# Altium PCB PCB1.PcbDoc
Units mil, origin at the board's own origin, x right, y up, seen from the top; angles counter-clockwise.
Board outline 4580 x 3075 mil, 2 copper layers (Top Layer, Bottom Layer); 11 components, 8 nets, 28 pads, 0 vias.
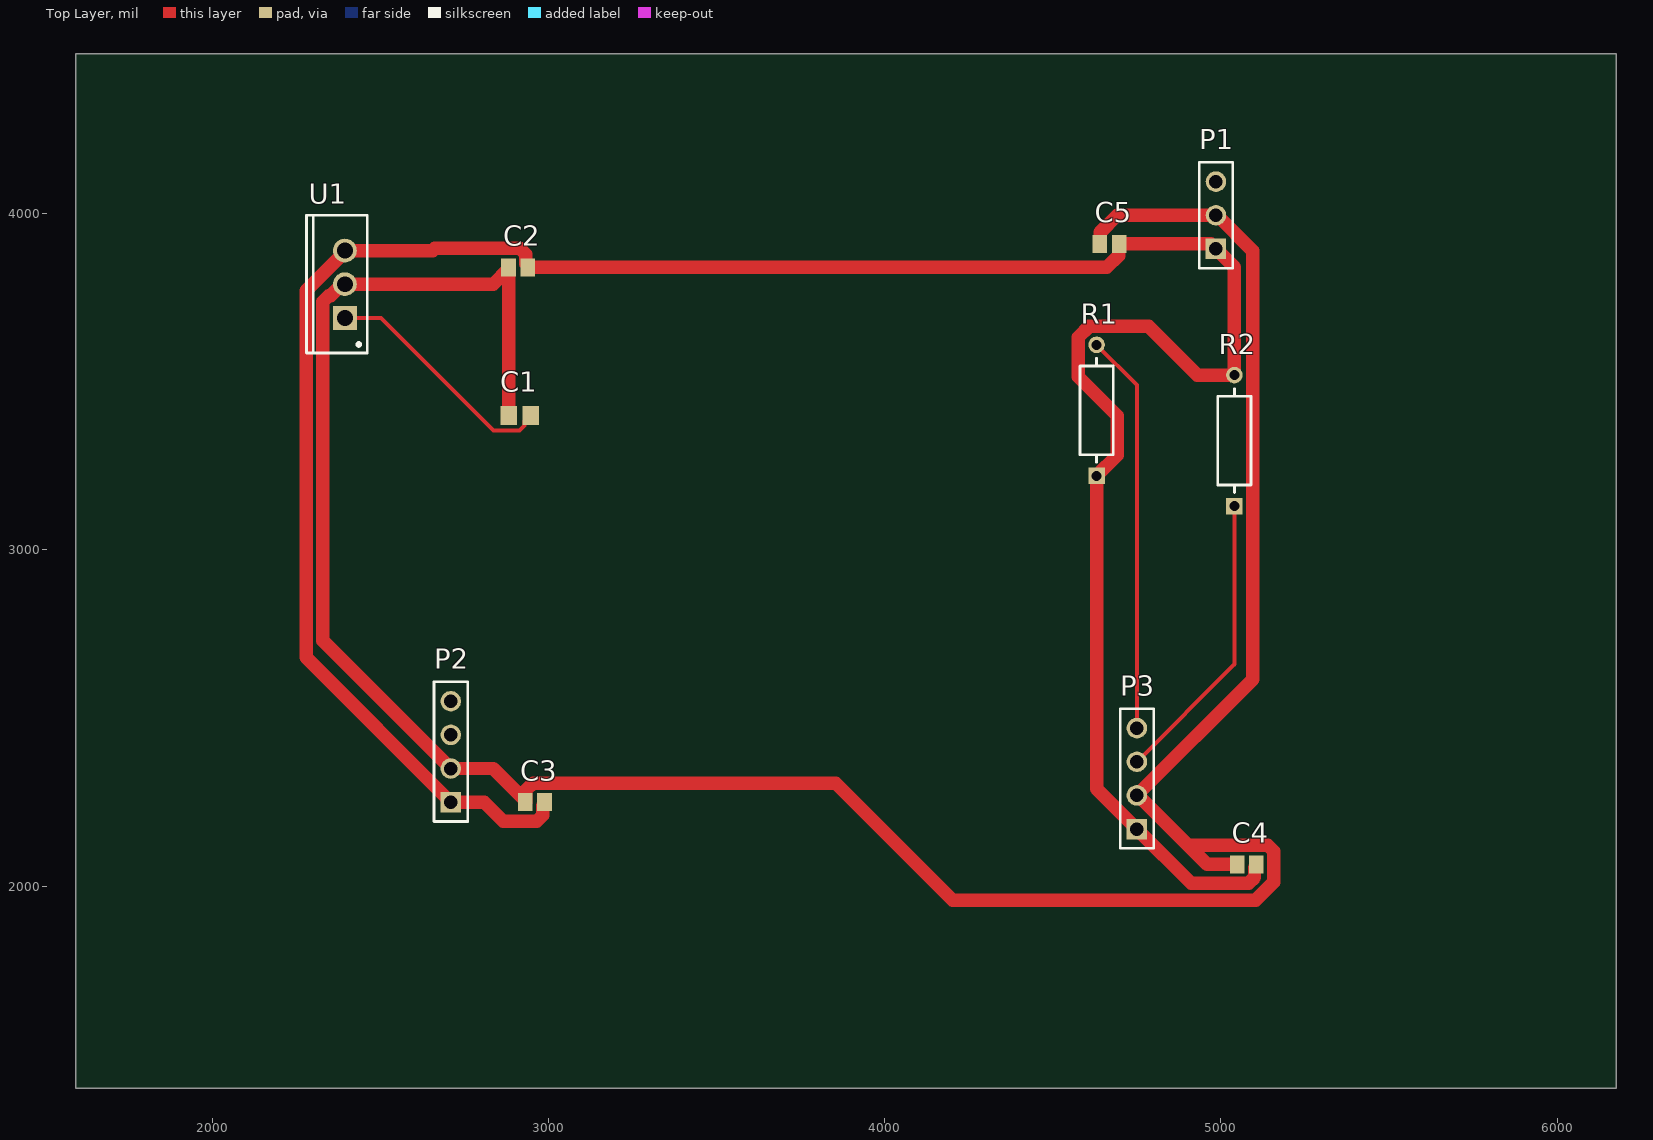
[diagram p0: Top Layer view]
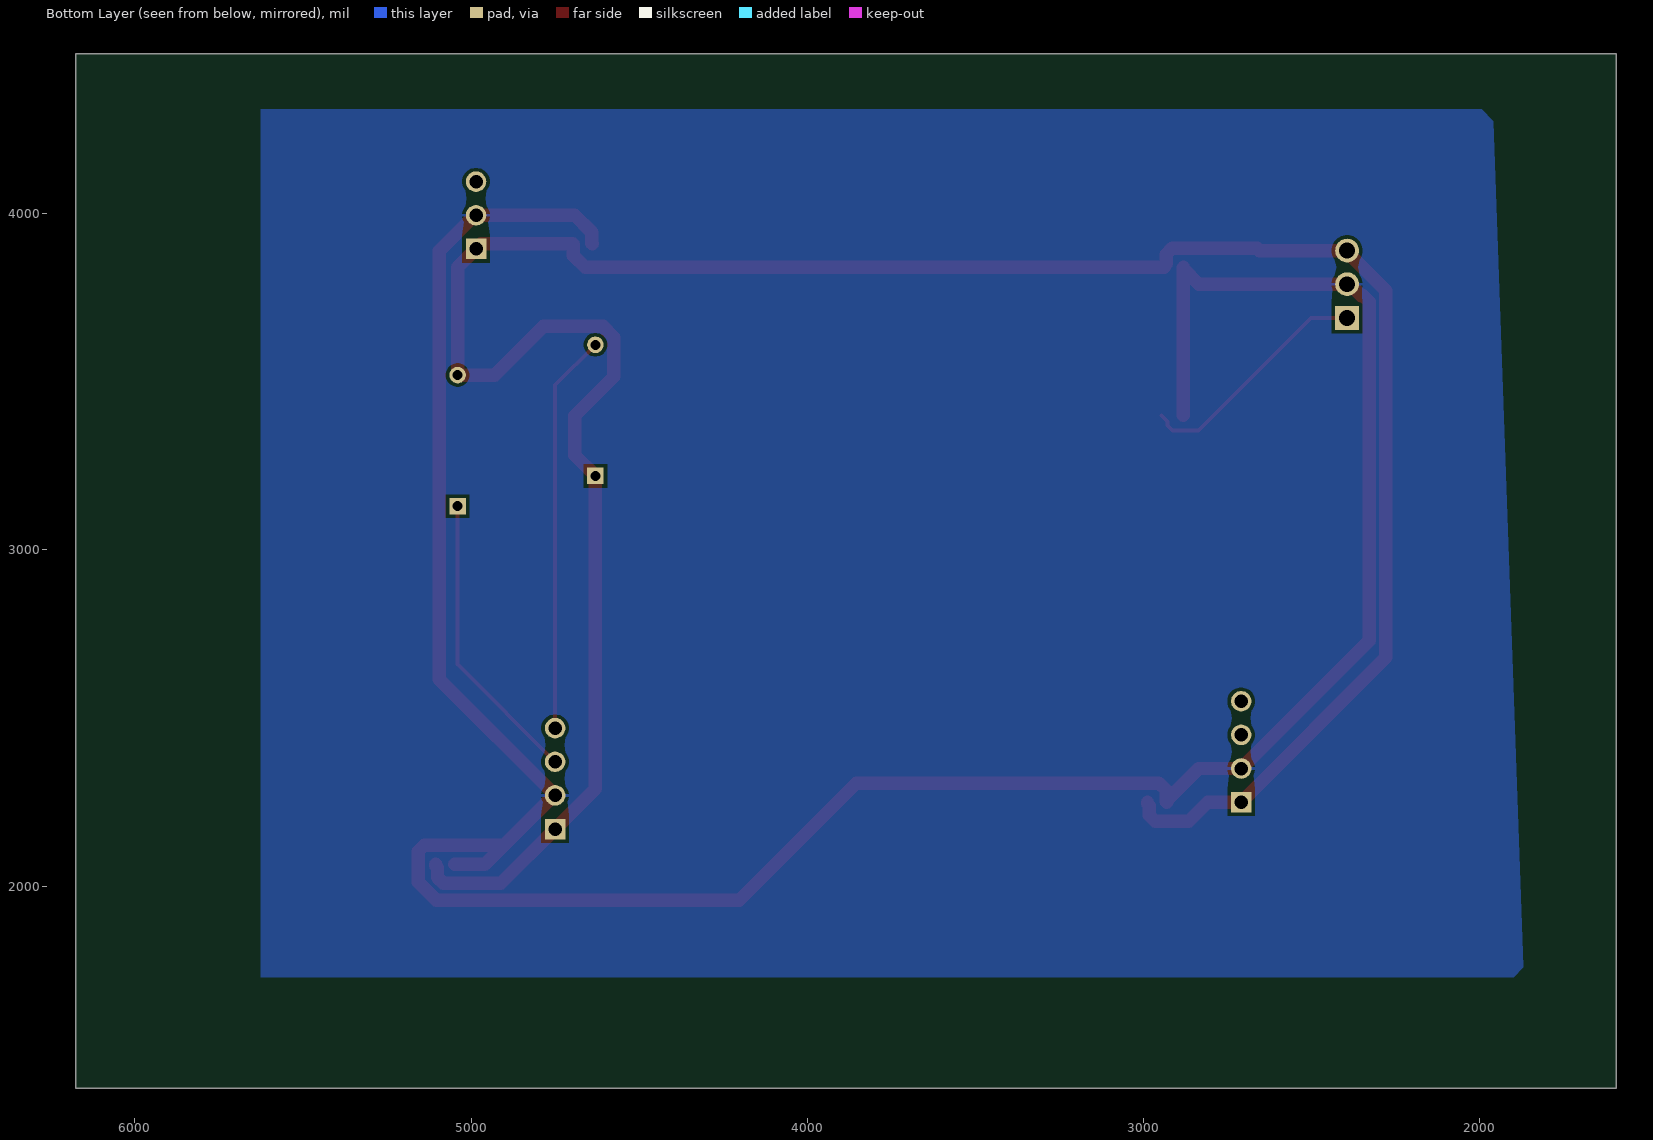
[diagram p1: Bottom Layer view, seen from below]

## Layer stack, top to bottom
Top Solder: solder mask 0.4, Solder Resist, Dk 3.5
Top Layer: signal copper 1.4
Dielectric 1: dielectric 12.6, FR-4, Dk 4.8
Bottom Layer: signal copper 1.4
Bottom Solder: solder mask 0.4, Solder Resist, Dk 3.5

## Board outline
1595,1400 1595,4475 6175,4475 6175,1400

## Design rules (kind name [scope] priority, off if disabled: settings)
Clearance [All] p1: gap=10 ignorepadtopadclearanceinfootprint=FALSE
PolygonConnect [All] p1: connectstyle=Relief reliefconductorwidth=10 reliefentries=4 polygonreliefangle="90 Angle" airgapwidth=10
RoutingVias [All] p1: holewidth=28 width=50 viastyle="Through Hole" minholewidth=28 minwidth=50 maxholewidth=28 maxwidth=50
SolderMaskExpansion [All] p1: expansion=0 istentingtop=FALSE
Width pwgnd [InNet('GND')] p1: maxlimit=60 minlimit=40 preferedwidth=40
Width Powerwidth [InNet('5V')] p2: maxlimit=60 minlimit=40 preferedwidth=40
Width [All] p3: maxlimit=15 minlimit=10 preferedwidth=12
30 further rules are at their usual default settings.

## Components (designator, comment, footprint, x,y, rotation, side; value= is the part's Value field where it differs from the comment)
C1 "VJ0805V334ZXACW1BC" CAPC2013X145X50NL20T20 2915,3400 r0 top
C2 "VJ0805Y104KXAMT2P" CAPC2013X145X48LL20T23 2910,3840 r0 top
C3 "VJ0805Y104KXAMT2P" CAPC2013X145X48LL20T23 2960,2250 r0 top
C4 "VJ0805Y104KXAMT2P" CAPC2013X145X48LL20T23 5076.46,2065 r0 top
C5 "VJ0805Y104KXAMT2P" CAPC2013X145X48LL20T23 4668.54,3910 r0 top
P1 "TSW-103-07-T-S" SMTC-TSW-103-07-X-S 4985,3895 r90 top
P2 "TSW-104-08-F-S" SMTC-TSW-104-08-X-S 2710,2250 r90 top
P3 "TSW-104-08-F-S" SMTC-TSW-104-08-X-S 4750,2170 r90 top
R1 "RCMM024701GKS14" FP-RCMM02-MFG 4630,3415 r90 top
R2 "RCMM024701GKS14" FP-RCMM02-MFG 5040,3325 r90 top
U1 "L7805CP" TO220FP 2395,3790 r90 top

## Footprints (in the part's own frame and the unit in brackets; to place one, negate y for a bottom-side part, rotate by r counter-clockwise, add the part's x,y. Pads: shape width x height; smd on the part's side, far side on the other; paste and mask are expansions set on the pad)
CAPC2013X145X48LL20T23 [mm] "Chip Capacitor, 2-Leads, Body 2.00x1.25mm, IPC High Density"
  rect 1.1x1.35 smd: 1(-0.725,0) 2(0.725,0)
  body extent -1.1,-0.72 1.1,0.72, height 1.45
CAPC2013X145X50NL20T20 [mm] "Chip Capacitor, 2-Leads, Body 2.00x1.25mm, IPC Medium Density"
  rect 1.25x1.45 smd: 1(-0.825,0) 2(0.825,0)
  body extent -1.1,-0.72 1.1,0.72, height 1.45
FP-RCMM02-MFG [mm]
  rect 1.25x1.25 hole 0.75 paste-2539.97 mask+0: 1(-4.95,0)
  round 1.25 hole 0.75 paste-2539.97 mask+0: 2(4.95,0)
  silkscreen extent -3.93,-1.25 3.93,1.25, body extent -5.68,-1.35 5.68,1.35, height 0.25
SMTC-TSW-103-07-X-S [mm] ".025 SQ Post Terminal Strip Assembly, 1x3 Pins, Vertical, 2.54mm Pitch, Male"
  rect 1.55x1.55 hole 1.02: 1(0,0)
  round 1.55 hole 1.02: 2(2.54,0) 3(5.08,0)
  silkscreen extent -1.46,-1.27 6.54,1.27, body extent -1.27,-1.27 6.35,1.27, height 8.38
SMTC-TSW-104-08-X-S [mm] ".025 SQ Post Terminal Strip Assembly, 1x4 Pins, Vertical, 2.54mm Pitch, Male"
  rect 1.55x1.55 hole 1.02: 1(0,0)
  round 1.55 hole 1.02: 2(2.54,0) 3(5.08,0) 4(7.62,0)
  silkscreen extent -1.46,-1.27 9.08,1.27, body extent -1.27,-1.27 8.89,1.27, height 8.38
TO220FP [mm] "TO, Thru-Hole, Vertical, Heatsink Mounted; 3 In-Line Leads; Pitch 2.54 mm"
  rect 1.8x1.8 hole 1.2: 1(-2.54,0)
  round 1.8 hole 1.2: 2(0,0) 3(2.54,0)
  silkscreen extent -5.2,-1.7 5.2,2.9, body extent -5.25,-1.75 5.25,2.95, height 20

## Part data
C1: library part CMP-2007-01320-1, Manufacturer=Vitramon, Part Number=VJ0805V334ZXACW1BC
C2 C3 C4 C5: library part CMP-2007-02027-1, Manufacturer=Vishay, Part Number=VJ0805Y104KXAMT2P
P1: library part CMP-1024-00332-1, "0.025\" SQ Post Header, Through-hole, Vertical, -55 to 105 degC, 2.54 mm Pitch, 3-Pin, Male, RoHS", Manufacturer=Samtec, Temperature Range="-55 to 105 degC", ComponentLink1Description="Manufacturer URL", ComponentLink1URL=http://www.samtec.com, ComponentLink2Description=Datasheet, ComponentLink2URL=http://www.samtec.com/documents/webfiles/pdf/TSW_TH.PDF, ComponentLink3Description="Package Specification", ComponentLink3URL=http://www.samtec.com/documents/webfiles/cpdf/TSW-XXX-XX-XXX-X-XX-XXX-MKT.pdf, DatasheetVersion=F-214, Mounting Technology=Through-hole, Orientation=Vertical, PackageDescription=".025[0.64] SQ. Post Terminal Strip Assembly", PackageReference=TSW-103-07-X-S, PackageVersion="DM, 8/1988", PartNumber=TSW-103-07-T-S, Pitch="2.54 mm", RoHS=True
P2 P3: library part CMP-1024-00355-1, "0.025\" SQ Post Header, Through-hole, Vertical, -55 to 125 degC, 2.54 mm Pitch, 4-Pin, Male, RoHS", Manufacturer=Samtec, Temperature Range="-55 to 125 degC", ComponentLink1Description="Manufacturer URL", ComponentLink1URL=http://www.samtec.com, ComponentLink2Description=Datasheet, ComponentLink2URL=http://www.samtec.com/documents/webfiles/pdf/TSW_TH.PDF, ComponentLink3Description="Package Specification", ComponentLink3URL=http://www.samtec.com/documents/webfiles/cpdf/TSW-XXX-XX-XXX-X-XX-XXX-MKT.pdf, DatasheetVersion=F-214, Mounting Technology=Through-hole, Orientation=Vertical, PackageDescription=".025[0.64] SQ. Post Terminal Strip Assembly", PackageReference=TSW-104-08-X-S, PackageVersion="DM, 8/1988", PartNumber=TSW-104-08-F-S, Pitch="2.54 mm", RoHS=True
R1 R2: library part CMP-02408-000034-1, "RES 4.7K OHM 2% 1/2W AXIAL", Case/Package=Molded, Resistance=4.7kR, Resistor Type="Metal Film", Temperature Coefficient=100ppm/°C, Tolerance=2%, Contact Plating=Tin, Diameter=2.5mm, Length=6.5mm, Mount="Through Hole", RoHS Compliant=Yes
U1: library part CMP-0244-00474-1, "Positive Voltage Regulator, 5V, 3-Pin TO-220FP", ComponentLink1Description="Manufacturer URL", ComponentLink1URL=http://www.st.com, ComponentLink2Description=Datasheet, ComponentLink2URL=http://www.st.com/internet/com/TECHNICAL_RESOURCES/TECHNICAL_LITERATURE/DATASHEET/CD00000444.pdf, DatasheetVersion=16/11/2011, PackageDescription="TO, Thru-Hole, Vertical, Heatsink Mounted; 3 In-Line Leads; Pitch 2.54 mm", PackageReference=TO220FP, PackageVersion=2011

## Nets (pads, with @x,y where several pads share a name; then routed paths per layer and width w, separated by ;. In a path a pad name is that pad's centre, name@x,y a point inside that pad or via, vN(x,y) a via of type N, cw(c..) or ccw(c..) an arc to the next point about the centre after c; other vN are vias at no path point)
5V: C2.2 C3.2 C4.2 C5.2 P1.1 P2.1 P3.1 R1.1 R2.2 U1.3 | length 7888.1
  Top Layer w40: C3.2 2988.54,2245.08 2983.11,2239.65 2983.11,2211 2965.54,2193.43 2866.06,2193.43 2809.48,2250 P2.1 2279.57,2680.43 2279.57,3770.47 2395,3885.9 U1.3 2656.16,3890 2662.73,3896.57 2915.54,3896.57 2933.11,3879 2933.11,3850.35 2938.54,3844.92 C2.2 4660.65,3840 4695.43,3874.78 4695.43,3908.35 C5.2 4970,3910 P1.1 5040,3840 R2.2 4929.76,3519.88 4785.16,3664.49 4607.38,3664.49 4575.39,3632.5 4575.39,3514.79 4691.17,3399.01 4691.17,3281.29 R1.1 4630,2290 P3.1 4911.57,2008.43 5081.99,2008.43 5099.57,2026 5099.57,2054.65 5105,2060.08 C4.2
ECHO: P2.4
GND: C1.1 C2.1 C3.1 C4.1 C5.1 P1.2 P2.2 P3.2 U1.2 | length 8335.1
  Top Layer w40: C1.1 2881.99,3400.53 2881.99,3839.47 C2.1 2881.46,3835.08 2836.38,3790 U1.2 2386.65,3790 2352.46,3755.81 2347.52,3755.81 2329.57,3737.86 2329.57,2730.43 P2.2 2836.38,2350 2931.46,2254.92 C3.1 2933.11,2251.65 2933.11,2285.22 2954.46,2306.57 3854.51,2306.57 4202.66,1958.43 5102.7,1958.43 5156.65,2012.37 5156.65,2104 5139.08,2121.57 4901.88,2121.57 ; C5.1 4641.65,3911.65 4641.65,3945.22 4691.43,3995 P1.2 4988.45,3995 5094.61,3888.84 5094.61,2614.61 P3.2 4753.45,2270 4901.88,2121.57 ; C4.1 4958.45,2065 4901.88,2121.57
OUT: P1.3
SCL: P3.3 R2.1 | length 880.2
  Top Layer w12: P3.3 5040,2660 R2.1
SDA: P3.4 R1.2 | length 1189.6
  Top Layer w12: R1.2 4750,3489.88 P3.4
TRIG: P2.3
VBAT: C1.2 U1.1 | length 715.8
  Top Layer w12: U1.1 2501.82,3690 2836.36,3355.46 2913.75,3355.46 2928.87,3370.58 2928.87,3381.39 C1.2

## Polygon pours and split planes (outlines as drawn)
GND on Bottom Layer "GND_L02_P000" (solid, pour order 0): 1960,4275 1995,4310 5625,4310 5625,1730 1870,1730

## Silkscreen, mask and mechanical layers (free items; w line width, h text height)
Mechanical 1:
  the board outline again, w10